# EAGLE board optoreflector (EAGLE 7.7.0)
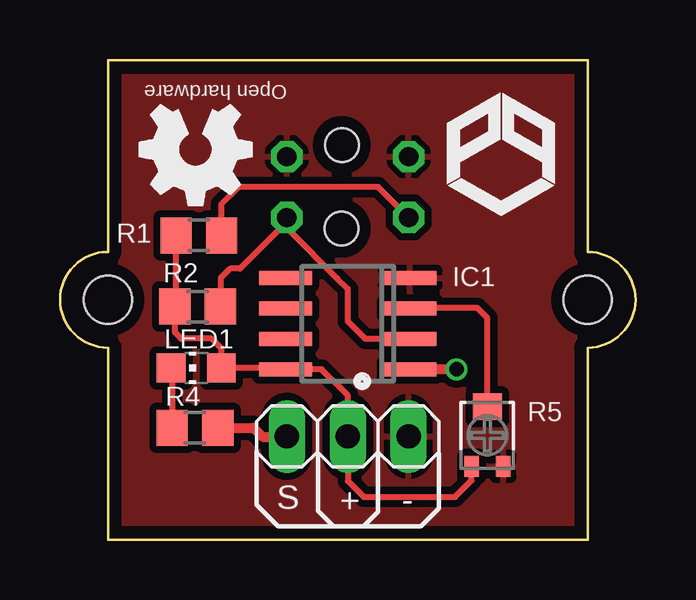
[diagram p0: board, top side]
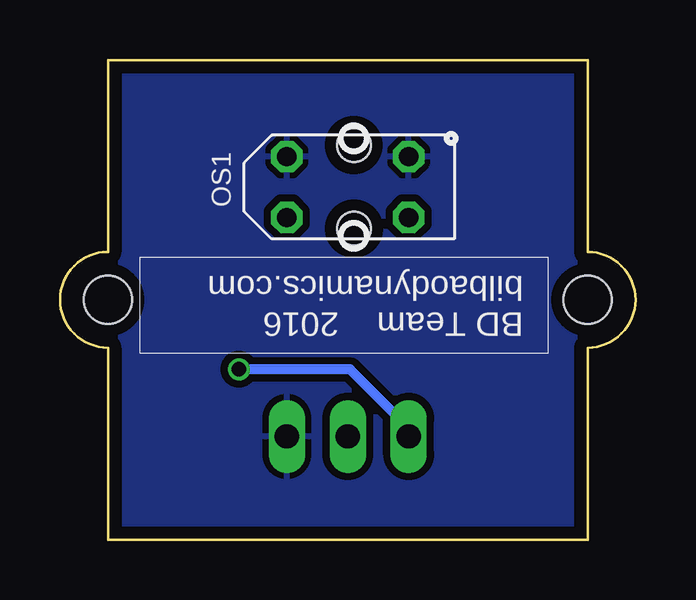
[diagram p1: board, bottom side, seen from below]

Size 24 x 20 mm. Coordinates in mm from the lower left corner, seen from the top.
Outline: 2,0 2,8 arc-180 2,12 2,20 22,20 22,12 arc-180 22,8 22,0 2,0
Copper layers (1*16): Top 0.035mm / dielectric 1.5mm / Bottom 0.035mm
Design rules "EagleRules": minimum track width 7mil, minimum drill 12mil, track to track 7mil, track to pad 7mil, pad to pad 7mil, via to via 7mil, smd to smd 0mil, copper to edge 20mil, drill to drill 10mil, minimum pad ring 10mil, minimum via ring 6mil, stop-mask expansion 2mil, vias tented up to drill 25mil, thermal gap 10mil
Holes 2 mm at 2,10 22,10
Holes 1.4 mm at 11.75,16.45 11.74,12.96

## Footprints (pad centres in the part's own frame; a part is rotated, then mirrored left to right if it is on the bottom)
SO08 = smd 0.6 x 2.2: 1 -1.905,-2.6; 2 -0.635,-2.6; 3 0.635,-2.6; 4 1.905,-2.6; 5 1.905,2.6; 6 0.635,2.6; 7 -0.635,2.6; 8 -1.905,2.6
1X03 = drill 1.016 long: 1 -2.54,0; 2 0,0; 3 2.54,0
CHIP-LED0805 = smd 1.2 x 1.2: A 0,-1.05; C 0,1.05
TCRT5000 = drill 0.8 octagon: A -2.54,-1.27; C 2.54,-1.27; E 2.54,1.27; K -2.54,1.27
R0805 = smd 1.3 x 1.5: 1 -0.95,0; 2 0.95,0
POT_EVM2W = smd 0.61 x 0.889: 1 -0.66,-1.295; 3 0.66,-1.295 | smd 1.194 x 1.092: 2 0,1.194

## Placement (x,y rotation side)
IC1  LM358D  [SO08]  12,9 90 top
JP1  [1X03]  12,4.3 0 top
LED1  [CHIP-LED0805]  5.68,7.16 90 top
OS1  TCRT5000  [TCRT5000]  12,14.7 0 bottom
R1  68  [R0805]  5.79,12.69 180 top
R2  20k  [R0805]  5.74,9.71 180 top
R4  330  [R0805]  5.63,4.66 180 top
R5  20KOHM  [POT_EVM2W]  17.82,4.35 0 top

## Library data of the parts
IC1 = linear
JP1 = pinhead
LED1 = led
OS1 = tcrt5000
R1 R2 R4 = rcl
R5 = Panasonic-Trimmer_Potentiometers; MPN: EVM2WSX80B24; OC_FARNELL: 1849774; OC_NEWARK: 17T5174; PACKAGE: EVM2W; POWERRATING: 0.15W; SUPPLIER: PANASONIC; TOLERANCE: ±25 %

## Nets
GND: IC1.4 JP1.3 OS1.E OS1.K R5.3
N$1: LED1.C R4.2
N$2: OS1.A R1.1
N$3: IC1.2 OS1.C R2.1
N$4: IC1.3 R5.2
N$5: IC1.1 JP1.1 R4.1
VCC: IC1.8 JP1.2 LED1.A R1.2 R2.2 R5.1

## Tracks (layer width: path | path; a pad name or v marks a point on that pad's centre or on a via)
GND
  pour Bottom (isolate 0.305): 2,20 22,20 22,12 23,11 23,9 22,8 22,0 2,0 2,8 1,9 1,11 2,12
  pour Top (isolate 0.305): 2,20 22,20 22,0 2,0
N$1
  Top 0.254: 4.68,7.16 R4.2
  Top 0.406: LED1.C 4.68,7.16
N$2
  Top 0.254: OS1.A 13.27,14.7 7.44,14.7 6.72,13.99 6.72,12.7 R1.1
N$3
  Top 0.254: OS1.C 9.5,13.39 | R2.1 6.7,10.9 7.1,11.3 7.5,11.3 9.46,13.26 OS1.C | IC1.2 12.73,8.37 12,9.1 12,10.45 11.56,10.89 9.55,12.9 9.55,13.34 OS1.C
N$4
  Top 0.254: R5.2 17.82,9.24 17.4,9.66 14.63,9.66 IC1.3
N$5  (via drill 0.61 pad 0.3)
  Top 0.406: R4.1 8.08,4.66 8.45,4.29 9.45,4.29 JP1.1 | v16.54,7.1 IC1.1
  Bottom 0.406: JP1.1 9.46,4.66 11.9,7.1 v16.54,7.1
VCC
  Top 0.254: R5.1 17.16,2.46 16.48,1.78 12.67,1.78 12,2.45 JP1.2 12,6 10.91,7.09 IC1.8 9.34,7.16 LED1.A 6.73,7.97 6.32,8.38 5.05,8.38 4.79,8.64 R2.2 4.84,9.76 R1.2

## Text on the board
tPlace: Open hardware | S | + | -
bPlace: BD Team 2016 / bilbaodynamics.com